# Allegro board CH340G-PCB.brd
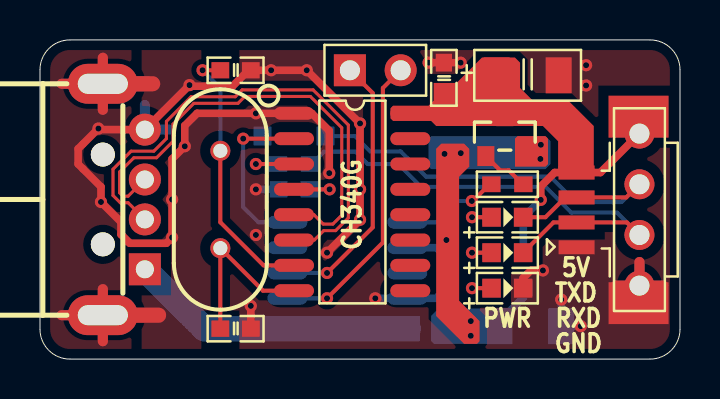
[diagram p0: board, top side]
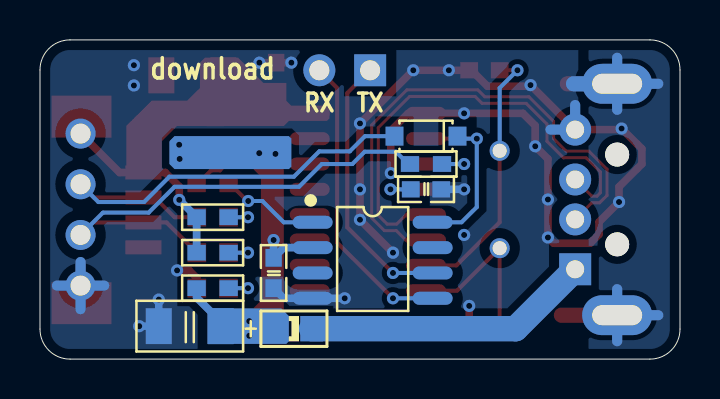
[diagram p1: board, bottom side, seen from below]

Outline 32 x 16 mm; copper layers: TOP, BOTTOM. Coordinates in mm from the lower left corner of the outline.
Outline path: 0,14.5 0,1.5 arc(0.44,0.44) 1.5,0 30.5,0 arc(31.56,0.44) 32,1.5 32,14.5 arc(31.56,15.56) 30.5,16 1.5,16 arc(0.44,15.56) 0,14.5

## Design rules (mm)
net group 90OHM: nets USB_D+ USB_D-
net group POWER: nets VCC_5V VIN VUSB

## Placement (name value [footprint] x y rotation side)
C1  0.01uF  [C0603]  12.7 8.51 0 bottom
C2  0.1uF  [C0603]  20.19 14.1 90 top
C3  10uF  [TA3216]  24.38 14.22 0 top
C4  22pF  [C0603]  9.78 14.48 180 top
C5  22pF  [C0603]  9.78 1.52 180 top
C6  22uF  [TA3216]  24.51 1.65 0 bottom
C7  0.1uF/NC  [C0603]  20.32 4.32 90 bottom
D1  1N5819  [SOD123]  12.7 11.18 180 bottom
D2  RED LED  [LED0603]  23.37 3.56 0 top
D3  YELLOW LED  [LED0603]  23.37 7.11 0 top
D4  GREEN LED  [LED0603]  23.37 5.33 0 top
F1  1A  [FULSE0805]  19.3 1.52 0 bottom
J1  SMT-CON-4P-1R25  [1_25_PWT_4P]  29.56 7.54 90 top
J2  CON4  [SIP-4]  29.97 3.68 90 top
J3  CON2  [SIP-2]  15.49 14.48 0 top
NOREF  -  []  30.5 0 90 top
NOREF#2  -  []  0 1.5 0 top
Q1  S8550  [SOT-23]  23.24 11.18 0 top
R1  300R  [R0603]  12.7 9.78 180 bottom
R2  1k  [R0603]  23.37 3.56 180 bottom
R3  1k  [R0603]  23.37 8.76 0 top
R4  1k  [R0603]  23.37 7.11 0 bottom
R5  1k  [R0603]  23.37 5.33 0 bottom
U1  CH340G  [SOIC-16]  12.7 12.32 0 top
U2  STC15F104W  [SOIC-8]  15.37 4.95 180 bottom
USB1  USB_A  [USB-A-M-DIP]  5.24 4.5 180 top
Y1  12MHz  [HC-49S]  9.02 8 270 top

## Library data of the parts
C1 C2 C4 C5 C7 = CAP NP
C3 C6 = CAP TAC
D1 = Diode
D2-D4 = LED
F1 = FUSE
J1 = SMT-CON-4P-1R25
J2 = CON4
J3 = CON2
Q1 = 2N3906_0
R1-R5 = RES
U1 = CH340G
U2 = STC15F104W
USB1 = USB_A
Y1 = CRYSTAL

## Footprints (pads in the part's own frame, mm; a bottom-side part is the same pattern mirrored in y, then rotated)
1_25_PWT_4P
  rect 0.701x1.801 smd: 1(-1.941,2.731) 2(-0.693,2.731) 3(0.559,2.731) 4(1.809,2.731)
  rect 2.101x3 smd: 5(-4.742,-0.368) 6(4.608,-0.368)
C0603
  rect 0.889x0.813 smd: 1(-0.762,0) 2(0.762,0)
FULSE0805
  rect 1.143x1.27 smd: 1(-0.889,0) 2(0.889,0)
HC-49S
  round 1.001 hole 0.701: 1(-2.441,0) 2(2.441,0)
LED0603
  rect 0.93x0.95 smd: 1(-0.79,0) 2(0.79,0)
R0603
  rect 0.914x0.787 smd: 1(-0.8,0) 2(0.8,0)
SIP-2
  rect 1.6x1.6 hole 1: 1(0,0)
  round 1.6 hole 1: 2(2.54,0)
SIP-4
  round 1.501 hole 1.001: 1(0,0) 2(2.54,0) 3(5.08,0) 4(7.62,0)
SOD123
  rect 0.899x0.95 smd: 1(-1.575,0) 2(1.575,0)
SOIC-8
  oval 1.999x0.65 smd: 1(-3,1.905) 2(-3,0.635) 3(-3,-0.635) 4(-3,-1.905) 5(3,-1.905) 6(3,-0.635) 7(3,0.635) 8(3,1.905)
SOIC-16
  oval 1.999x0.65 smd: 1(0,0) 2(0,-1.27) 3(0,-2.54) 4(0,-3.81) 5(0,-5.08) 6(0,-6.35) 7(0,-7.62) 8(0,-8.89) 9(5.814,-8.89) 10(5.814,-7.62) 11(5.814,-6.35) 12(5.814,-5.08) 13(5.814,-3.81) 14(5.814,-2.54) 15(5.814,-1.27) 16(5.814,0)
SOT-23
  rect 0.851x1.001 smd: 1(-0.95,-1.001) 2(0.95,-1.001) 3(0,1.001)
TA3216
  rect 1.301x1.801 smd: 1(-1.549,0) 2(1.549,0)
USB-A-M-DIP
  round 1.199 hole 1.199 unplated: (2.101,-1.25) (2.101,-5.751)
  rect 1.6x1.6 hole 0.899: 1(0,0)
  round 1.6 hole 0.899: 2(0,-2.499) 3(0,-4.501) 4(0,-7)
  oval 3.5x1.999 hole 2.499x1.001: 5(2.101,2.301) 6(2.101,-9.299)

## Nets
GND: C1.1 C2.2 C3.2 C4.1 C5.1 C6.2 C7.1 D2.2(K) J1.1 J1.5 J2.1 U1.1(GND) U2.4(GND) USB1.4(GND) USB1.5 USB1.6
VCC_5V: C2.1 C3.1 J1.4 J1.6 J2.4 Q1.3(COLLECTOR) R4.2 R5.2 U1.16(VCC)
VIN: C6.1 C7.2 F1.2 Q1.2(EMITTER) R2.1 U2.2(VCC)
BOOT_RX: J3.2 U2.5(P3.0/RXD)
BOOT_TX: J3.1 U2.6(P3.1/TXD)
MCU_RXD: D1.1 D3.2(K) J1.3 J2.3
MCU_TXD: D4.2(K) J1.2 J2.2 R1.1
POW_5V: R3.1 U2.1(P3.4)
RXD: R1.2 U1.3(RXD)
TXD: D1.2 U1.2(TXD) U2.8(P3.3)
USB_D+: U1.5(D+) USB1.3(D+)
USB_D-: U1.6(D-) USB1.2(D-)
VUSB: F1.1 USB1.1(VCC)
N01000: C1.2 U1.4(V3)
N01654: C5.2 U1.8(XO) Y1.2
N01658: C4.2 U1.7(XI) Y1.1
N02671: D2.1(A) R2.2
N05077: D3.1(A) R4.1
N05280: D4.1(A) R5.1
N06169: Q1.1(BASE) R3.2

Pads without a net: U1 9 10 11 12 13 14 15; U2 3 7

## Via types
v1: diameter 0.61, hole 0.305, TOP to BOTTOM, 43 vias

## Routing (per net, layer and track width the routed paths; a pad name or vN(x,y) marks a point on that pad's centre or on a via; arc(x,y) is an arc through that point)
GND: length 97.6
  TOP w0.381: v1(21.03,14.86) C2.2 v1(19.43,14.86) ; D2.2 24.16,4.06 24.54,4.45 v1(25.15,4.45) ; C5.1 v1(10.54,2.67) ; v1(14.46,9.32) 14.46,11.45 13.59,12.32 U1.1 v1(10.79,12.32) 7.86,12.32 7.24,11.7 v1(7.24,10.67) 6.6,10.03 v1(6.6,8) v1(6.6,6.1) 6.32,5.81 4.49,5.81 4.05,6.25 4.05,6.87 v1(3.05,7.87) 3.05,8.64 1.91,9.78 1.91,10.54 v1(2.92,11.56) 2.98,11.5 USB1.4 v1(7.47,13.73) 7.53,13.68 9.62,13.68 10.42,14.48 C4.1 v1(11.56,14.48) v1(13.34,14.48) v1(16,11.81) v1(16,8.51) v1(16,6.99) v1(14.35,5.33)
  TOP w0.508: J2.1 29.97,4.87 ; J2.1 31.15,3.68 ; J2.1 29.97,2.5 ; J2.1 28.79,3.68 ; 3.14,12.5 USB1.6 ; USB1.6 1.09,13.8 ; USB1.6 3.14,15.11 ; 1.09,2.2 USB1.5 ; USB1.5 3.14,0.9 ; USB1.5 3.14,3.51
  TOP w0.762: USB1.5 5.93,2.2 ; USB1.6 5.63,13.8
  BOTTOM w0.381: C7.1 19.81,3.05 U2.4 v1(16.76,3.05) ; v1(26.06,2.98) C6.2 v1(27.04,1.65) ; C1.1 v1(10.79,8.51)
  BOTTOM w0.508: 3.14,0.9 USB1.5 ; USB1.5 3.14,3.51 ; USB1.5 1.09,2.2 ; J2.1 29.97,4.87 ; J2.1 29.97,2.5 ; J2.1 28.79,3.68 ; J2.1 31.15,3.68 ; USB1.6 3.14,15.11 ; USB1.6 1.09,13.8 ; USB1.6 3.14,12.5 ; 6.47,11.5 USB1.4 5.24,12.73
  BOTTOM w0.762: USB1.6 5.32,13.8
  vias: v1(10.79,6.22) v1(27.3,14.73) v1(27.3,13.72)
VCC_5V: length 10.6
  TOP w0.381: v1(25.04,7.98) 25.04,8.66 25.74,9.35 J1.4 28.02,9.35 J2.4 29.97,12.11 J1.6
  BOTTOM w0.381: R5.2 R4.2 v1(25.04,7.98)
VIN: length 5.2
  BOTTOM w0.381: v1(20.32,5.97) C7.2 19.81,5.59 U2.2 ; 22.96,1.88 24.17,3.09 R2.1
  vias: v1(20.23,10.29) v1(21.04,10.32) v1(21.54,1.91) v1(21.54,1.17) v1(25.04,10.74) v1(25.02,10.03)
BOOT_RX: length 14.9
  TOP w0.203: v1(14.35,3.05) 17.14,5.84 17.14,13.59 J3.2
  BOTTOM w0.203: U2.5 v1(14.35,3.05)
BOOT_TX: length 13.6
  TOP w0.203: v1(14.35,4.32) 16.64,6.6 16.64,13.33 J3.1
  BOTTOM w0.203: U2.6 v1(14.35,4.32)
MCU_RXD: length 23.9
  TOP w0.203: D3.2 25.27,7.11 26.26,8.1 J1.3 29.31,8.1 J2.3
  BOTTOM w0.203: J2.3 29.08,7.87 26.8,7.87 25.53,9.14 19.3,9.14 18.03,10.41 16.51,10.41 15.75,11.18 D1.1
MCU_TXD: length 25.2
  TOP w0.203: J2.2 29.34,6.85 J1.2 25.67,6.85 D4.2
  BOTTOM w0.203: R1.1 13.59,9.78 14.21,10.4 15.77,10.4 16.38,9.78 17.91,9.78 19.05,8.64 25.27,8.64 26.57,7.34 28.85,7.34 J2.2
POW_5V: length 5
  TOP w0.203: R3.1 22.48,8.76 21.64,7.92 v1(21.59,7.92)
  BOTTOM w0.203: U2.1 19.81,6.86 20.88,7.92 v1(21.59,7.92)
RXD: length 3
  TOP w0.203: v1(10.79,9.78) U1.3
  BOTTOM w0.203: R1.2 v1(10.79,9.78)
TXD: length 9.5
  TOP w0.203: 12.7,11.05 v1(10.16,11.05)
  BOTTOM w0.203: D1.2 11,11.05 v1(10.16,11.05) 10.16,7.62 10.92,6.86 U2.8
USB_D+: length 23.7
  TOP w0.152: USB1.3 4.41,8.17 4.15,8.17 3.98,8.34 3.98,9.38 4.69,10.09 5.83,10.09 6.65,10.92 6.65,11.78 7.69,12.82 9.9,12.82 10.24,13.16 13.52,13.16 15.09,11.6 15.09,7.21 14.64,6.77 14.16,6.77 13.69,7.24 U1.5
USB_D-: length 25.9
  TOP w0.152: 12.7,5.97 13.72,5.97 14.19,6.44 14.78,6.44 15.42,7.08 15.42,11.73 13.66,13.49 10.11,13.49 9.76,13.15 7.55,13.15 6.32,11.92 6.32,11.06 5.69,10.42 4.55,10.42 3.65,9.52 3.65,8.2 4.01,7.84 4.41,7.84 USB1.2
VUSB: length 14.4
  BOTTOM w1.27: USB1.1 8.22,1.52 F1.1
N01000: length 2.8
  TOP w0.203: U1.4 v1(14.48,8.51)
  BOTTOM w0.203: C1.2 v1(14.48,8.51)
N01654: length 8.6
  TOP w0.203: 12.7,3.43 11.15,3.43 Y1.2 C5.2
N01658: length 13.5
  TOP w0.203: Y1.1 9.02,6.86 11.18,4.7 U1.7 ; C4.2 v1(8.13,14.48)
  BOTTOM w0.203: Y1.1 9.02,13.59 v1(8.13,14.48)
N02671: length 1.9
  TOP w0.203: D2.1 v1(21.6,3.56)
  BOTTOM w0.203: R2.2 v1(21.6,3.56)
N05077: length 1.9
  TOP w0.203: D3.1 v1(21.6,7.11)
  BOTTOM w0.203: R4.1 v1(21.6,7.11)
N05280: length 1.9
  TOP w0.203: D4.1 v1(21.6,5.33)
  BOTTOM w0.203: R5.1 v1(21.6,5.33)
N06169: length 2.5
  TOP w0.203: Q1.1 23,9.46 23.44,9.46 24.14,8.76 R3.2

## Copper pours and planes (outline as drawn; the poured copper is in the pictures)
VCC_5V on TOP (solid shape): 24,14.86 24,13.59 24.64,12.95 26.42,12.95 27.69,11.68 27.69,9.27 27.56,9.14 26.16,9.14 25.91,9.4 25.91,10.92 25.15,11.68 19.81,11.68 19.56,11.94 17.65,11.94 17.53,12.06 17.53,12.57 17.65,12.7 19.43,12.7 19.68,12.95 19.68,13.84 20.83,13.84 22.1,15.11 23.75,15.11
VIN on TOP (solid shape): 25.4,11.05 25.4,9.78 25.27,9.65 23.75,9.65 23.75,11.05 23.88,11.18 25.27,11.18
VIN on TOP (solid shape): 21.46,10.54 21.46,9.65 20.95,9.14 20.95,2.92 21.97,1.91 21.97,0.89 21.84,0.76 21.21,0.76 19.81,2.16 19.81,10.54 20.07,10.79 21.21,10.79
VIN on BOTTOM (solid shape): 23.62,0.76 19.68,0.76 19.56,0.89 19.56,2.16 19.94,2.54 23.62,2.54
VIN on BOTTOM (solid shape): 25.53,10.92 25.53,9.78 25.27,9.53 19.56,9.53 19.43,9.65 19.43,11.05 19.56,11.18 25.27,11.18
GND on TOP: 5.08,0.51 5.08,15.49 30.5,15.49 31.2,15.2 31.49,14.5 31.49,1.5 31.2,0.8 30.5,0.51 ; 1 cut-out
GND on TOP, BOTTOM: 1.5,0.51 0.8,0.8 0.51,1.5 0.51,14.5 0.8,15.2 1.5,15.49 4.57,15.49 4.57,0.51
GND on BOTTOM: 5.08,0.51 5.08,15.49 30.5,15.49 31.2,15.2 31.49,14.5 31.49,1.5 31.2,0.8 30.5,0.51 ; 2 cut-outs

## Text on the board
Ref Des/Silkscreen Bottom: TX | RX | download
Ref Des/Silkscreen Top: PWR | 5V | TXD | RXD | GND | CH340G
DIMENSION: FIGURE | SIZE | 12.0 | 27.598 | 35.402 | 39.37 | 39.402 | 47.201 | 98.402x39.402 | DRILL CHART: TOP to BOTTOM | ALL UNITS ARE IN MILS | PLATED | NON-PLATED | QTY | 43 | 2 | 1 | 3 | 4
